# Altium PCB DB_Memory.PcbDoc (part 2 of 2)
Units mm, origin at the board's own origin, x right, y up, seen from the top; angles counter-clockwise.
Board outline 63.5 x 43.5 mm, 2 copper layers (Top Layer, Bottom Layer), stack 1.671 mm thick; 45 components, 30 nets, 135 pads, 49 vias.
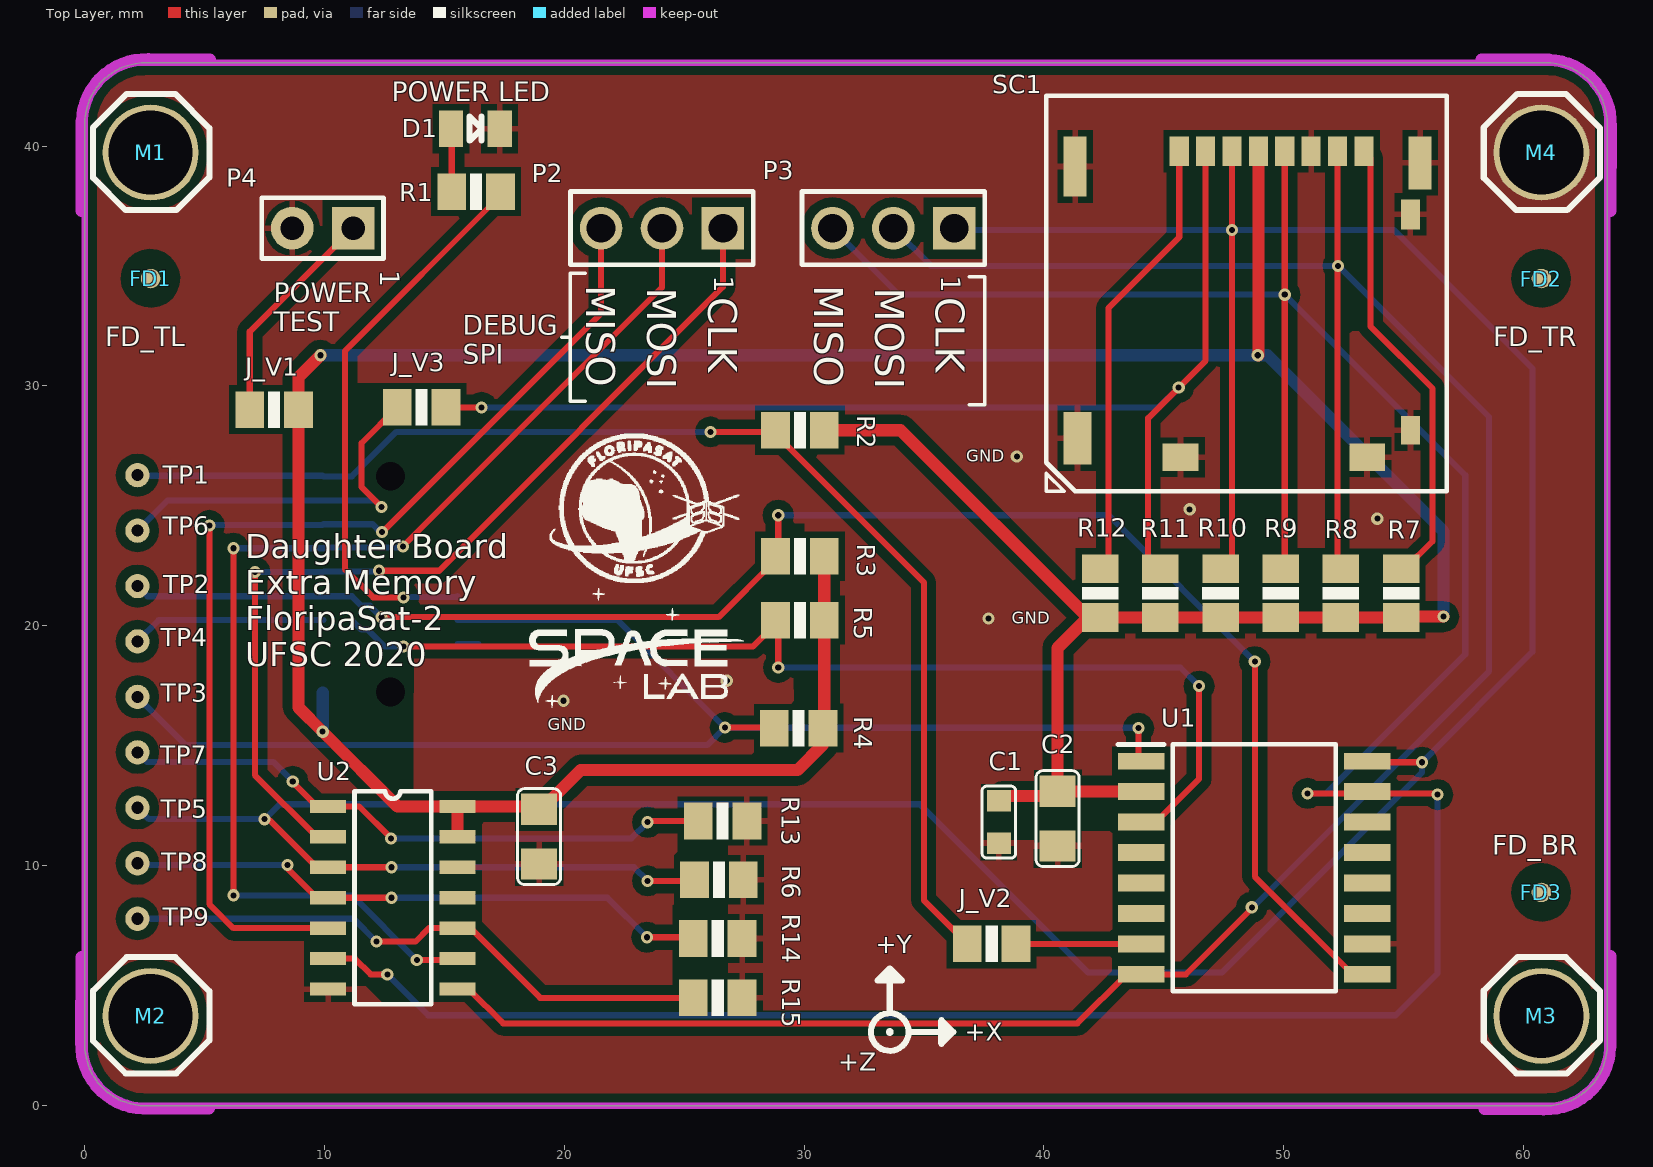
[diagram p0: Top Layer view]

## Polygon pours and split planes (outlines as drawn) (continued)
GND on Top Layer "Top Layer-GND" (solid, remove dead copper, pour order 14): 0,40.825 cw(c2.65,40.825) 2.65,43.475 60.825,43.475 cw(c60.825,40.8) 63.5,40.8 63.5,2.625 cw(c60.85,2.625) 60.85,-0.025 2.65,-0.025 cw(c2.65,2.625) 0,2.625
no net on Top Layer "Top Layer-No Net" (solid, pour order 10): -6.675,21.425
GND on Bottom Layer "Bottom Layer-GND" (solid, remove dead copper, pour order 16): 0,40.681 cw(c2.794,40.681) 2.794,43.475 60.706,43.475 cw(c60.706,40.681) 63.5,40.681 63.5,2.769 cw(c60.706,2.769) 60.706,-0.025 2.794,-0.025 cw(c2.794,2.769) 0,2.769

## Keep-outs
Keep-Out Layer:
  lines w0.254: 0,2.515 ccw(c2.54,2.515) 2.54,-0.025 60.96,-0.025 ccw(c60.96,2.515) 63.5,2.515 63.5,40.935 ccw(c60.96,40.935) 60.96,43.475 2.54,43.475 ccw(c2.54,40.935) 0,40.935 0,38.5 0,2.515
  lines w0.5: -0.125,6.175 -0.15,2.625 ccw(c2.532,2.532) 2.44,-0.15 5.175,-0.15 ; -0.125,37.3 -0.125,41.035 cw(c2.558,40.942) 2.65,43.625 5.225,43.607 ; 58.25,43.6 61.06,43.6 cw(c60.968,40.917) 63.65,40.825 63.625,37.3 ; 58.375,-0.158 60.85,-0.175 ccw(c60.942,2.507) 63.625,2.415 63.625,6.225

## Other copper
Top Layer:
  pour cut-out: 7.401,30.023 7.4,30.022 7.4,28 8.259,28 8.268,27.991 8.268,30.023
  pour cut-out: 15.92,30.116 15.734,29.93 15.734,27.967 13.849,26.081 13.069,26.081 11.368,27.782 11.368,30.125
  pour cut-out: 13.739,17.225 13.733,17.218 13.733,13.107 13.308,13.107 9.563,16.853 9.563,30.092 10.32,30.85 10.332,30.85 10.332,22.498 13.739,19.091
  pour cut-out: 41.579,12.437 41.579,11.439 41.593,11.425 42.847,11.425 42.847,12.409 42.819,12.437
  pour cut-out: 39.571,11.62 39.571,11.043 38.879,11.043 38.879,11.62
  pour cut-out: 39.571,10.934
  pour cut-out: 38.879,11.62 38.879,11.043 38.994,11.043 39.571,11.62
  pour cut-out: 37.371,11.99 37.371,11.62 39.8,11.62 40.045,11.375 41.243,11.375 41.579,11.711 41.579,12.189 39.625,12.189 39.571,12.243 38.879,12.243 38.879,11.99
  pour cut-out: 37.663,7.741 37.987,7.741 37.987,5.709 37.663,5.709
  pour cut-out: 24.53,5.491 26.238,5.491 26.238,10.366 26.321,10.449 26.321,10.785 26.272,10.834 24.73,10.834 24.73,10.566 24.58,10.416 24.58,8.384 24.53,8.334
  pour cut-out: 24.475,13.325
  pour cut-out: 26.238,3.926 26.562,3.926 26.562,4.348 26.823,4.348 26.825,4.35 26.825,12.803 26.762,12.866 26.438,12.866 26.438,10.834 26.288,10.684 26.288,8.384 26.238,8.334
  pour cut-out: 11.154,4.967 11.727,4.971 12.387,4.311 14.546,4.311 14.546,5.369 16.554,5.369 16.554,5.043 17.671,3.926 18.678,3.926 18.717,4.053 16.671,6.071 16.554,6.023 16.554,5.581 13.42,5.581 13.359,5.642 13.309,5.593 13.239,5.593 13.239,5.223 12.868,4.852 12.788,4.932 11.727,4.971 11.281,5.362 11.154,5.309
  pour cut-out: 9.146,5.581 9.146,5.369 10.023,5.369 10.023,5.102 10.277,5.1 10.277,5.369 11.094,5.369 11.147,5.496 11.062,5.581
  pour cut-out: 6.845,13.288 6.792,13.235 6.718,13.235 6.718,9.118 6.34,8.74 6.34,8.046 6.304,8.009 6.415,7.898 11.143,7.898 11.154,7.909 11.154,6.851 9.146,6.851 9.146,6.639 11.387,6.639 11.431,6.595 11.525,6.689 11.876,6.689 12.53,7.343 13.8,7.343 14.366,7.909 16.554,7.909 16.554,8.121 14.546,8.121 14.546,9.179 16.554,9.179 16.554,9.391 15.677,9.391 15.677,9.639 15.688,9.65 15.423,9.65 15.423,9.391 14.546,9.391 14.546,9.793 14.8,9.793 14.8,10.047 14.546,10.047 14.546,11.719 14.465,11.8 14.465,11.813 13.118,11.813 13.079,11.774 13.079,8.083 13.048,8.052 12.968,8.132 9.46,8.132 8.033,9.56 7.999,9.56 7.999,10.434 8.141,10.575 8.141,10.722 6.902,11.961 6.902,12.173 7.02,12.173 7.442,12.594 7.442,12.69
  pour cut-out: 29.613,14.94 29.613,16.741 29.572,16.782 29.523,18.498 29.443,18.618 29.443,19.215 29.663,19.215 29.663,21.247 28.229,21.247 28.181,21.296 28.181,21.365 28.687,21.871 29.663,21.871 29.663,23.903 29.443,23.903 29.443,24.232 29.461,24.25 30,24.25 30,23.916 29.987,23.903 29.987,21.871 30.194,21.871 30.194,21.247 29.987,21.247 29.987,19.215 30.194,19.215 30.194,16.741 29.937,16.741 29.937,15.098 29.73,14.891
  pour cut-out: 55.916,21.512 55.916,21.188 53.884,21.188 53.884,20.981 53.406,20.981 53.406,21.188 51.374,21.188 51.374,20.981 50.896,20.981 50.896,21.188 48.864,21.188 48.864,20.981 48.386,20.981 48.386,21.188 46.354,21.188 46.354,20.981 45.876,20.981 45.876,21.188 43.844,21.188 43.844,20.981 43.366,20.981 43.366,21.188 41.903,21.188 41.696,21.395 41.745,21.443 41.745,21.512 43.366,21.512 43.366,23.22 43.218,23.22 43.218,33.035 46.105,35.923 46.105,35.967 46.194,35.967 46.232,35.928 46.232,31.265 43.9,28.932 43.9,21.637 44.025,21.512 45.876,21.512 45.876,23.22 46.354,23.22 46.354,21.512 48.368,21.512 48.368,30.751 48.414,30.797 49.387,30.797 49.405,30.815 49.436,30.784 49.532,30.784 49.532,23.22 48.864,23.22 48.864,21.512 50.896,21.512 50.896,23.22 51.374,23.22 51.374,21.512 53.406,21.512 53.406,23.22 53.884,23.22 53.884,21.512
  pour cut-out: 52.768,38.904 53.105,38.904 53.105,32.319 53.144,32.279 53.14,32.275 52.768,32.275
  pour cut-out: 14.546,10.661 16.554,10.661 16.554,10.449 14.546,10.449
  pour cut-out: 29.663,29.166 29.987,29.166 29.987,27.708 29.87,27.66 29.663,27.866
  pour cut-out: 16.163,39.116 16.487,39.116 16.487,37.816 16.28,37.61 16.163,37.658 16.163,37.671
  region: 0,43.475
  region: -0.1,43.475
Bottom Layer:
  pour cut-out: 17.304,26.784 12.848,26.784 12.852,27.557 17.3,27.557
  pour cut-out: 13.954,3.384 9.675,7.257 11.635,7.935 14.973,4.598
  pour cut-out: 2.2,27.172 13.796,27.172 13.796,7.775 2.2,7.775
  pour cut-out: 10.972,26.784
  pour cut-out: 7,12.4
  pour cut-out: 11.831,16.88 11.729,16.88 11.515,16.666 10.572,16.666 10.572,15.644 10.692,15.525 13.796,15.525 13.796,16.855 11.856,16.855

## Silkscreen, mask and mechanical layers (free items; w line width, h text height)
Top Overlay:
  drawing of 1615 lines, arcs and shapes, not listed
  text "POWER LED" at 12.8,41.875 h0.8
  text "1" at 12.325,34.825 h0.8 r270
  text "1" at 26.254,34.6 h0.8 r270
  text "1" at 35.725,34.6 h0.8 r270
  text "FD_TL" at 0.85,31.65 h0.8
  text "FD_TR" at 58.75,31.65 h0.8
  text "GND" at 36.775,26.825 h0.5
  text "GND" at 38.659,20.066 h0.5
  text "Daughter Board / Extra Memory / FloripaSat-2 / UFSC 2020" at 6.7,18.3 h1
  text "GND" at 19.309,15.625 h0.5
  text "FD_BR" at 58.7,10.45 h0.8
  text "+Y" at 33,6.325 h0.76
  text "+X" at 36.7,2.675 h0.76
  text "+Z" at 31.425,1.425 h0.76
Bottom Overlay:
  text "GND" at 41,26.85 h0.5
  text "GND" at 48.175,24.625 h0.5
  text "GND" at 54.575,23.25 h0.5
  text "GND" at 40.005,20.066 h0.5
  text "GND" at 27.4,18.4 h0.5
  text "GND" at 22.15,16.625 h0.5
Board Outline:
  lines w0.254: 0,2.515 ccw(c2.54,2.515) 2.54,-0.025 60.96,-0.025 ccw(c60.96,2.515) 63.5,2.515 63.5,40.935 ccw(c60.96,40.935) 60.96,43.475 2.54,43.475 ccw(c2.54,40.935) 0,40.935 0,38.5 0,2.515
ASM Top:
  lines w0.1: 40.105,25.6 40.107,25.602
  lines w0.15: 40.105,25.6 40.105,26.35 ; 40.105,26.345 40.848,25.602 40.107,25.602
  text "U1" at 46.475,14.2 h0.5
  text "C2" at 40.15,12.975 h0.5
  text "C1" at 37.8,12.45 h0.5
  text "C3" at 18.525,12.2 h0.5
Sheet:
  drawing of 1221 lines, arcs and shapes, not listed
  text "Layer" at -11.097,73.097 h1.52
  text "Name" at -0.685,73.097 h1.52
  text "Material" at 22.931,73.097 h1.52
  text "Thickness" at 44.769,73.097 h1.52
  text "Constant" at 61.275,73.097 h1.52
  text "Board Layer Stack" at 75.749,73.097 h1.52
  text "Board Layer Stack" at 104.189,73.097 h1.52
  text "Board Layer Stack" at 132.629,73.097 h1.52
  text "Board Layer Stack" at 161.069,73.097 h1.52
  text "Board Layer Stack" at 189.509,73.097 h1.52
  text "Board Layer Stack" at 217.949,73.097 h1.52
  text "Board Layer Stack" at 246.389,73.097 h1.52
  text "1" at -11.097,70.049 h1.52
  text "Top Overlay" at -0.685,70.049 h1.52
  text "2" at -11.097,67.001 h1.52
  text "Top Solder" at -0.685,67.001 h1.52
  text "Solder Resist" at 22.931,67.001 h1.52
  text "0,010mm" at 44.769,67.001 h1.52
  text "3,5" at 61.275,67.001 h1.52
  text "3" at -11.097,63.953 h1.52
  text "Top Layer" at -0.685,63.953 h1.52
  text "Copper" at 22.931,63.953 h1.52
  text "0,036mm" at 44.769,63.953 h1.52
  text "4" at -11.097,60.905 h1.52
  text "Dielectric 1" at -0.685,60.905 h1.52
  text "FR-4" at 22.931,60.905 h1.52
  text "1,600mm" at 44.769,60.905 h1.52
  text "4,8" at 61.275,60.905 h1.52
  text "5" at -11.097,57.857 h1.52
  text "Bottom Layer" at -0.685,57.857 h1.52
  text "Copper" at 22.931,57.857 h1.52
  text "0,036mm" at 44.769,57.857 h1.52
  text "6" at -11.097,54.809 h1.52
  text "Bottom Solder" at -0.685,54.809 h1.52
  text "Solder Resist" at 22.931,54.809 h1.52
  text "0,010mm" at 44.769,54.809 h1.52
  text "3,5" at 61.275,54.809 h1.52
  text "7" at -11.097,51.761 h1.52
  text "Bottom Overlay" at -0.685,51.761 h1.52
  text "DB_Memory" at 141.625,-3.275 h1.92
  text "VARIANT:" at 122.75,-3.663 h2.41
  text "DATE:" at 140.375,-9.125 h1.92
  text "1.1" at 132.15,-9.2 h1.92
  text "21/03/2020" at 151.1,-9.2 h1.92
  text "REV." at 122.9,-9.438 h2.41
  text "TITLE: OBDH 2.0 DAUGHTERBOARD" at 35.375,-9.613 h2.54
  text "Silkscreen color: yellow" at 75.9,-14.375 h1.92
  text "MATERIAL:" at 35.215,-14.523 h1.92
  text "FR4" at 52.042,-14.523 h1.92
  text "Project: FloripaSat-2" at 122.675,-14.55 h1.92
  text "Space Technology Research Laboraty" at 121.85,-18.15 h1.45
  text "Board Tickness:" at 34.89,-19.286 h1.92
  text "Layers: 02" at 76.1,-19.3 h1.92
  text "1.69mm" at 63.575,-19.4 h1.92
  text "Federal University of Santa Catarina" at 122,-20.9 h1.4
  text "SpaceLab UFSC" at 121.975,-23.775 h1.4
  text "Drawing:" at 76.35,-23.825 h1.92
  text "Yan C. de Azeredo" at 91.55,-23.825 h1.73
  text "PCB Surface:" at 34.7,-24.2 h1.92
  text "ENIG" at 57.525,-24.325 h1.73
Drill Drawing:
  circle w0.254: c70.216,23.431 r0.451
  lines w0.254: 69.765,16.89 70.667,16.89 70.667,17.792 69.765,17.792 69.765,16.89 ; 69.765,19.822 70.667,19.822 70.216,18.92 69.765,19.822 ; 69.765,21.176 69.991,21.176 70.216,20.95 70.442,21.176 70.667,21.176 70.442,21.401 70.667,21.627 70.442,21.627 70.216,21.852 69.991,21.627 69.765,21.627 69.991,21.401 69.765,21.176 ; 69.765,25.01 70.216,25.236 70.667,25.01 70.442,25.461 70.667,25.913 70.216,25.687 69.765,25.913 69.991,25.461 69.765,25.01
  lines w0.381: 68.919,16.281 169.079,16.281 ; 68.919,26.431 169.079,26.431 ; 76.754,14.251 76.754,28.462 ; 84.298,14.251 84.298,28.462 ; 100.366,14.251 100.366,28.462 ; 107.592,14.251 107.592,28.462 ; 117.904,14.251 117.904,28.462 ; 138.436,14.251 138.436,28.462 ; 146.799,14.251 146.799,28.462 ; 157.273,14.251 157.273,28.462 ; 68.919,14.251 169.079,14.251 169.079,28.462 68.919,28.462 68.919,14.251
  text "Symbol" at 70.137,27.04 h0.97
  text "Count" at 77.363,27.04 h0.97
  text "Hole Size" at 84.907,27.04 h0.97
  text "Plated" at 100.975,27.04 h0.97
  text "Hole Type" at 108.201,27.04 h0.97
  text "Drill Layer Pair" at 118.513,27.04 h0.97
  text "Via/Pad" at 139.045,27.04 h0.97
  text "Pad Shape" at 147.408,27.04 h0.97
  text "Template" at 157.882,27.04 h0.97
  text "49" at 77.363,25.01 h0.81
  text "0,254mm (10,00mil)" at 84.907,25.01 h0.81
  text "PTH" at 100.975,25.01 h0.81
  text "Round" at 108.201,25.01 h0.81
  text "Top Layer - Bottom Layer" at 118.513,25.01 h0.81
  text "Via" at 139.045,25.01 h0.81
  text "Rounded" at 147.408,25.01 h0.81
  text "v51h25m0mx0" at 157.882,25.01 h0.81
  text "9" at 77.363,22.98 h0.81
  text "0,508mm (20,00mil)" at 84.907,22.98 h0.81
  text "PTH" at 100.975,22.98 h0.81
  text "Round" at 108.201,22.98 h0.81
  text "Top Layer - Bottom Layer" at 118.513,22.98 h0.81
  text "Pad" at 139.045,22.98 h0.81
  text "Rounded" at 147.408,22.98 h0.81
  text "c102h51" at 157.882,22.98 h0.81
  text "2" at 77.363,20.95 h0.81
  text "0,991mm (39,00mil)" at 84.907,20.95 h0.81
  text "PTH" at 100.975,20.95 h0.81
  text "Round" at 108.201,20.95 h0.81
  text "Top Layer - Bottom Layer" at 118.513,20.95 h0.81
  text "Pad" at 139.045,20.95 h0.81
  text "(Mixed)" at 147.408,20.95 h0.81
  text "(Mixed)" at 157.882,20.95 h0.81
  text "8" at 77.363,18.92 h0.81
  text "1,200mm (47,24mil)" at 84.907,18.92 h0.81
  text "PTH" at 100.975,18.92 h0.81
  text "Round" at 108.201,18.92 h0.81
  text "Top Layer - Bottom Layer" at 118.513,18.92 h0.81
  text "Pad" at 139.045,18.92 h0.81
  text "(Mixed)" at 147.408,18.92 h0.81
  text "(Mixed)" at 157.882,18.92 h0.81
  text "4" at 77.363,16.89 h0.81
  text "3,500mm (137,79mil)" at 84.907,16.89 h0.81
  text "PTH" at 100.975,16.89 h0.81
  text "Round" at 108.201,16.89 h0.81
  text "Top Layer - Bottom Layer" at 118.513,16.89 h0.81
  text "Pad" at 139.045,16.89 h0.81
  text "Rounded" at 147.408,16.89 h0.81
  text "c400h350m400" at 157.882,16.89 h0.81
  text "72 Total" at 77.363,14.86 h0.81

## Dimensions
0,0 to 0,43.475 on Dimensions
0,0 to 63.5,-0.025 on Dimensions

## Text inside footprints (layer, text, board x,y; h text height)
P1: Bottom Overlay "DVCC" at 7.3,16.95 h0.5; Bottom Overlay "ANT" at 7.05,17.95 h0.5; Bottom Overlay "BAT" at 7.05,18.975 h0.5; Bottom Overlay "CLK" at 7.05,21.925 h0.5; Bottom Overlay "MISO" at 7.258,22.975 h0.5; Bottom Overlay "MOSI" at 7.217,23.925 h0.5; Bottom Overlay "IC2C" at 19.95,25.35 h0.5; Bottom Overlay "ADC" at 19.742,22.892 h0.5; Bottom Overlay "GPIO" at 19.95,20.433 h0.5; Bottom Overlay "GND" at 19.742,17.975 h0.5; Bottom Overlay "CS" at 6.8,25.55 h0.5; Bottom Overlay "GPIO" at 7.258,20.525 h0.5
P2: Top Overlay "DEBUG  / SPI" at 15.775,30.925 h0.8; Top Overlay "MISO" at 20.923,34.193 h1.2 r270; Top Overlay "MOSI" at 23.463,34.093 h1.2 r270; Top Overlay "CLK" at 26.003,33.693 h1.2 r270
P3: Top Overlay "CLK" at 35.503,33.693 h1.2 r270; Top Overlay "MOSI" at 32.963,34.093 h1.2 r270; Top Overlay "MISO" at 30.423,34.193 h1.2 r270
P4: Top Overlay "POWER / TEST" at 7.875,32.275 h0.8